# Altium PCB PCB1.PcbDoc
Units mil, origin at the board's own origin, x right, y up, seen from the top; angles counter-clockwise.
Board outline 4235.03 x 3390.01 mil, 2 copper layers (Top Layer, Bottom Layer); 33 components, 44 nets, 165 pads, 6 vias.
Unrouted connection lines stored in the file: 69.
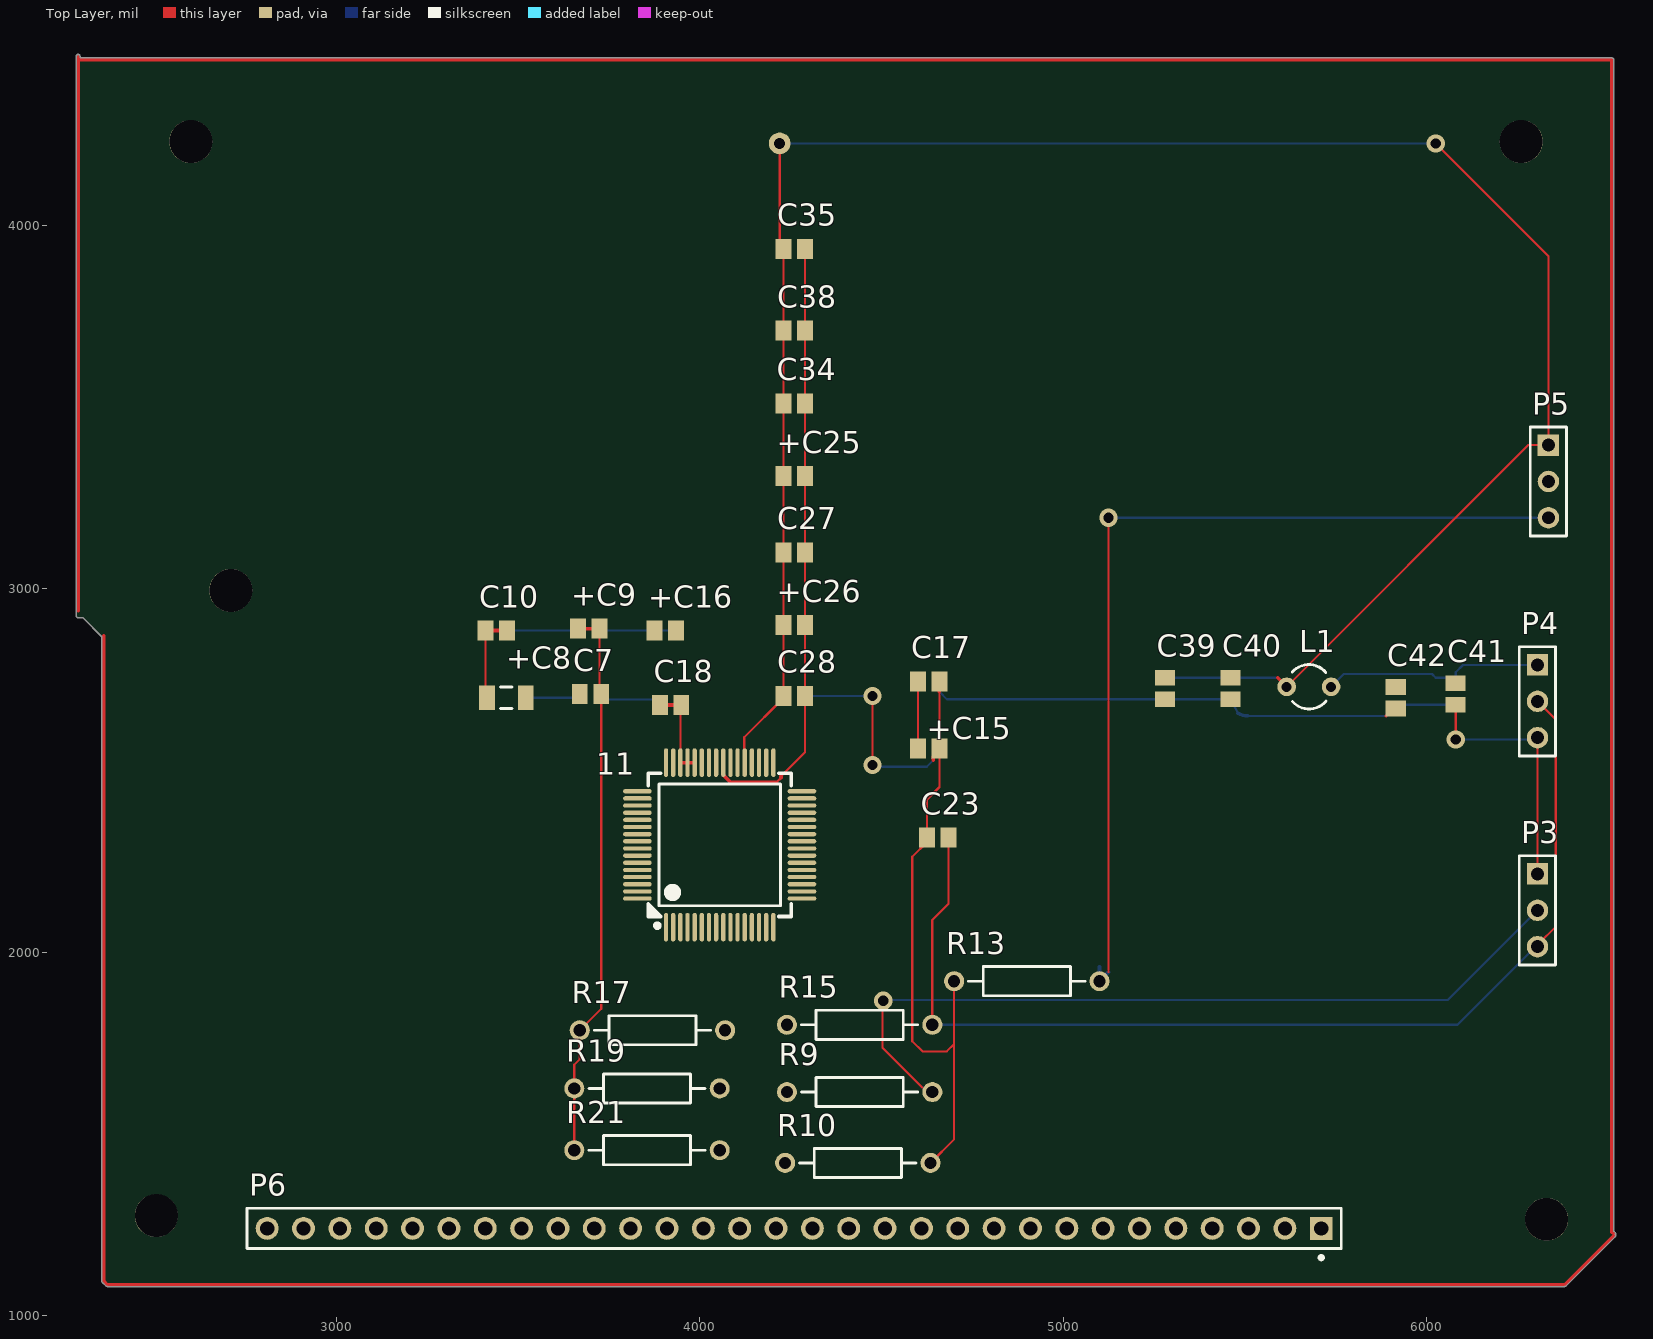
[diagram p0: Top Layer view]
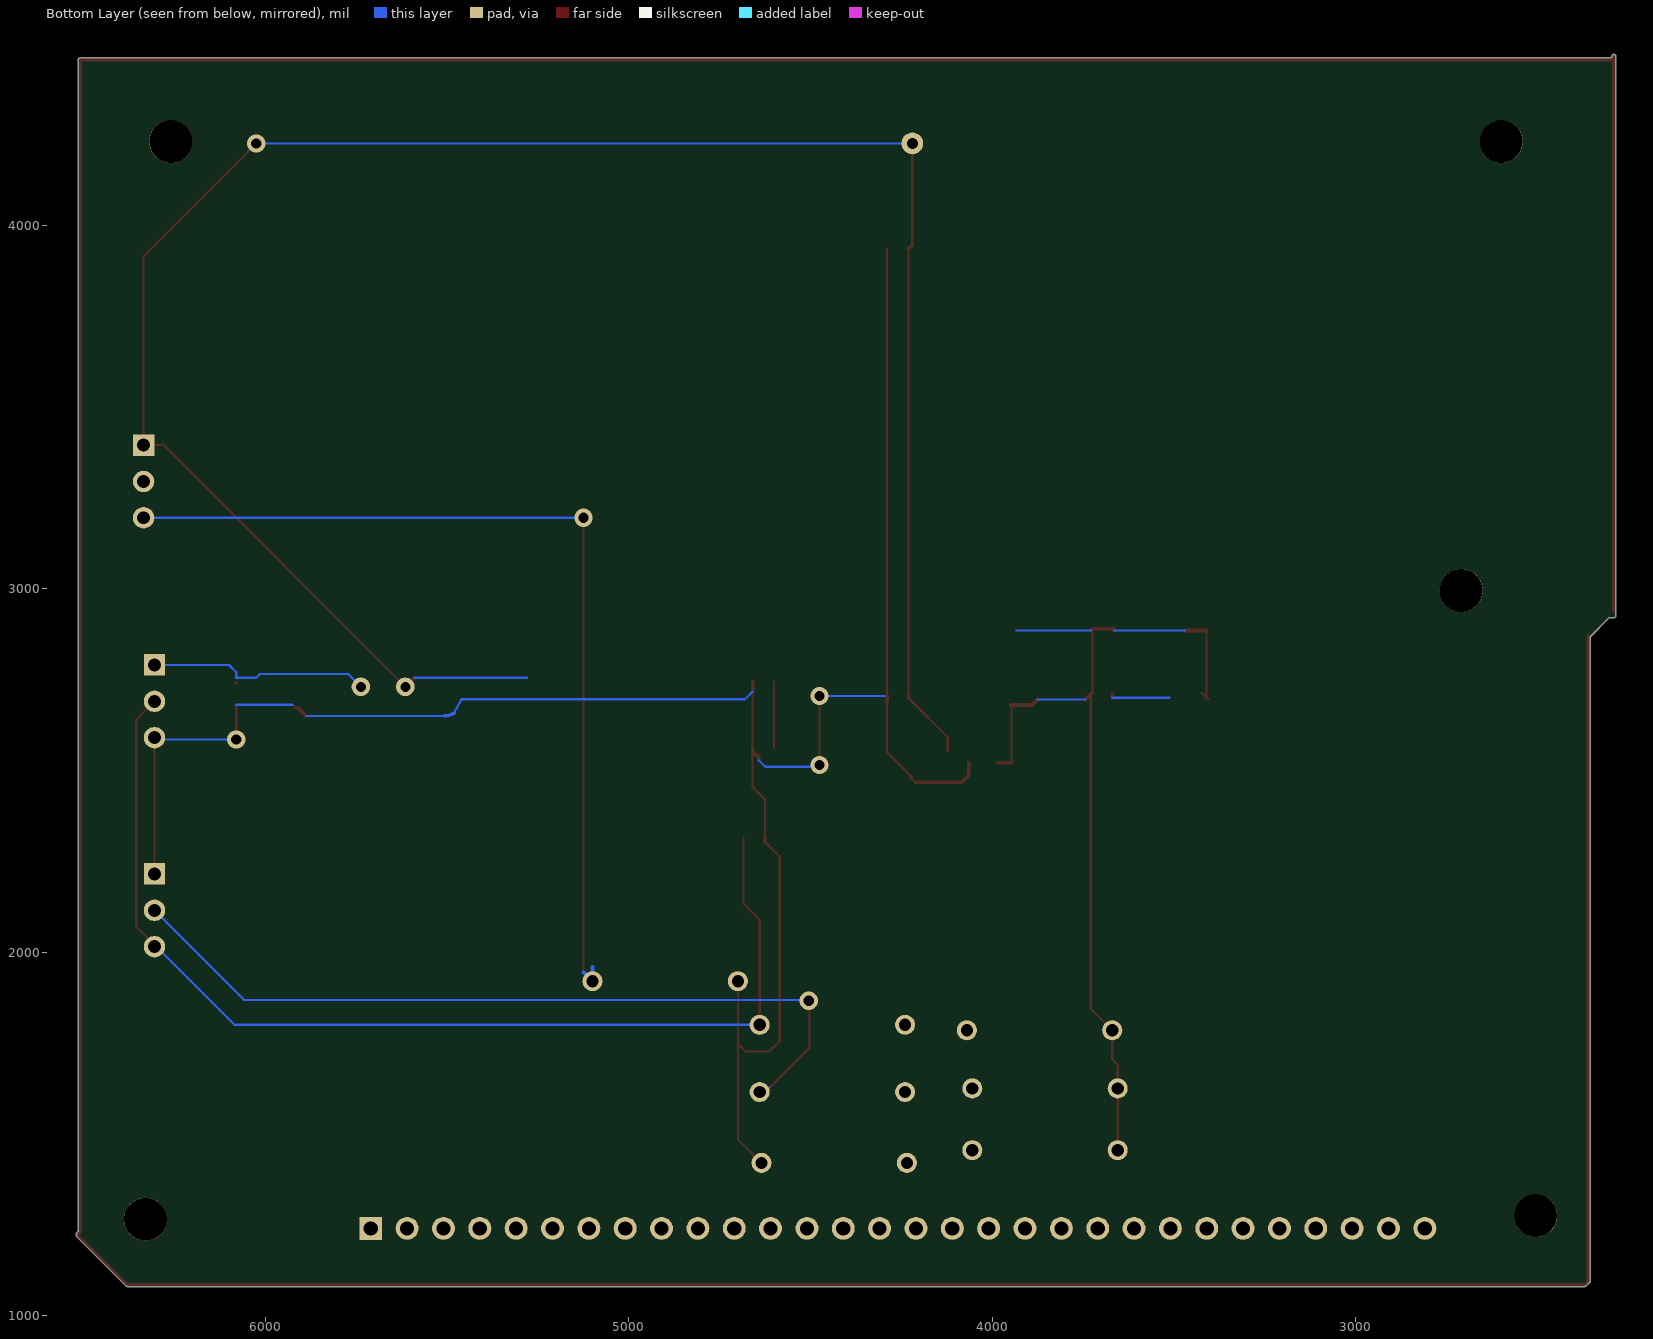
[diagram p1: Bottom Layer view, seen from below]

## Layer stack, top to bottom
Top Solder: solder mask 0.4, Solder Resist, Dk 3.5
Top Layer: signal copper 1.4
Dielectric 1: dielectric 12.6, FR-4, Dk 4.8
Bottom Layer: signal copper 1.4
Bottom Solder: solder mask 0.4, Solder Resist, Dk 3.5

## Board outline
2354.99,2867.92 2302.92,2919.99 2290,2919.99 cw(c2290,2925) 2284.99,2925 2284.99,4465 cw(c2290,4465) 2295.01,4465 2295.01,4460.02 6510,4460.02 cw(c6510,4455) 6515.02,4455 6515.02,1232.08 6518.55,1228.55 cw(c6515,1225) 6520.02,1225 cw(c6515,1225) 6519.35,1222.5 cw(c6515,1220) 6520.02,1220 cw(c6515,1220) 6518.55,1216.45 6383.55,1081.45 6383.56,1081.47 cw(c6380,1085) 6380,1079.98 2370,1079.98 cw(c2370,1085) 2366.44,1081.47 2366.45,1081.45 2356.45,1091.45 2356.47,1091.44 cw(c2360,1095) 2354.99,1095

## Design rules (kind name [scope] priority, off if disabled: settings)
Clearance [All] p1: gap=10 ignorepadtopadclearanceinfootprint=TRUE except(0: Arc-Hole Track-Hole SMDPad-Hole THPad-Hole Via-Hole Fill-Hole Poly-Hole Region-Hole Text-Hole)
PolygonConnect [All] p1: connectstyle=Relief reliefconductorwidth=10 reliefentries=4 polygonreliefangle="90 Angle" airgapwidth=10
RoutingVias [All] p1: holewidth=28 width=50 viastyle="Through Hole" minholewidth=28 minwidth=50 maxholewidth=28 maxwidth=50
SolderMaskExpansion [All] p1: expansion=4 istentingtop=FALSE
Width Width_1 [InNetClass('POWER')] p1: maxlimit=20 minlimit=6 preferedwidth=10
Width [All] p2: maxlimit=20 minlimit=10 preferedwidth=10
30 further rules are at their usual default settings.

## Components (designator, comment, footprint, x,y, rotation, side; value= is the part's Value field where it differs from the comment)
11 "Component_1" LQFP-64_L10.0-W10.0-P0.50-LS12.0-BL 4055,2295 r0 top
+C8 "CD10u/25V-B(3528)" C1206 3468.15,2700 r180 top value=10u/25V
+C9 "CD10u/25V-B(3528)" C0805#1 3694.53,2890 r0 top value=10u/25V
+C15 "CD10u/25V-B(3528)" C0805#1 4630,2560 r0 top value=10u/25V
+C16 "CD10u/25V-B(3528)" C0805#1 3905,2885 r180 top value=10u/25V
+C25 "CD10u/25V-B(3528)" C0805#1 4260,3310 r0 top value=10u/25V
+C26 "CD10u/25V-B(3528)" C0805#1 4260,2900 r0 top value=10u/25V
C7 "C100n-1206" C0805#1 3699.53,2710 r180 top value=100n
C10 "C100n-1206" C0805#1 3440,2885 r180 top value=100n
C17 "C100n-1206" C0805#1 4630,2745 r180 top value=100n
C18 "C100n-1206" C0805#1 3920,2680 r0 top
C23 "C100n-1206" C0805#1 4655,2315 r0 top
C27 "C100n-1206" C0805#1 4260,3100 r180 top
C28 "C100n-1206" C0805#1 4260,2705 r180 top
C34 "C100n-1206" C0805#1 4260,3510 r180 top
C35 "C100n-1206" C0805#1 4260,3935 r180 top
C38 "CD10u/25V-B(3528)" C0805#1 4260,3710 r0 top value=10u/25V
C39 "CD10u/25V-B(3528)" C0805#1 5280,2725.47 r270 top value=10u/25V
C40 "CD10u/25V-B(3528)" C0805#1 5460,2725.47 r270 top value=10u/25V
C41 "CD10u/25V-B(3528)" C0805#1 6080,2710 r270 top value=10u/25V
C42 "C100n-1206" C0805#2 5915,2700 r90 top
L1 "L180R-0603" R38 5676.02,2730 r90 top value=180R
P3 "Header 3" HDR1X3 6305,2215 r270 top
P4 "Header 3" HDR1X3 6305,2790 r270 top
P5 "Header 3" HDR1X3 6335,3395 r270 top
P6 "Header 30" HDR1X30 5710,1240 r180 top
R9 "R300R-0805" AXIAL-0.4 4440,1615 r0 top value=0805/4K3/5%
R10 "R300R-0805" AXIAL-0.4 4435,1420 r180 top value=0805/4K3/5%
R13 "R300R-0805" AXIAL-0.4 4900,1920 r180 top value=0805/4K3/5%
R15 "R300R-0805" AXIAL-0.4 4440,1800 r180 top value=0805/4K3/5%
R17 "R36K-0805" AXIAL-0.4 3870,1785 r180 top value=36K
R19 "R36K-0805" AXIAL-0.4 3855,1625 r180 top value=36K
R21 "R36K-0805" AXIAL-0.4 3855,1455 r180 top value=36K

## Footprints (in the part's own frame and the unit in brackets; to place one, negate y for a bottom-side part, rotate by r counter-clockwise, add the part's x,y. Pads: shape width x height; smd on the part's side, far side on the other; paste and mask are expansions set on the pad)
AXIAL-0.4 [mm] "Axial Device, Thru-Hole; 2 Leads; 0.4 in Pin Spacing"
  round 1.4 hole 0.85: 1(-5.08,0) 2(5.08,0)
  silkscreen extent -4.06,-1.02 4.06,1.02
C0805#1 [mm] "Chip Capacitor, Body 2.0x1.3mm, IPC High Density"
  rect 1.1x1.4 smd: 1(-0.75,0) 2(0.75,0)
  body extent -1.1,-0.72 1.1,0.72, height 1.4
C0805#2 [mm] "Chip Capacitor, Body 2.0x1.3mm, IPC High Density"
  rect 1.1x1.4 smd: 1(-0.75,0) " "(0.75,0)
  body extent -1.1,-0.72 1.1,0.72, height 1.4
C1206 [mm] "Chip Capacitor, Body 3.2x1.6mm, IPC High Density"
  rect 1.1x1.7 smd: 1(-1.35,0) 2(1.35,0)
  silkscreen extent -0.4,-0.75 0.4,0.75, body extent -1.7,-0.9 1.7,0.9, height 1.3
HDR1X3 [mm] "Connector; Header; 3 Position"
  rect 1.5x1.5 hole 0.9: 1(0,0)
  round 1.5 hole 0.9: 2(2.54,0) 3(5.08,0)
  silkscreen extent -1.27,-1.27 6.35,1.27
HDR1X30 [mm] "Connector; Header; 30 Position"
  rect 1.6x1.6 hole 0.99: 1(0,0)
  round 1.6 hole 0.99: 2(2.54,0) 3(5.08,0) 4(7.62,0) 5(10.16,0) 6(12.7,0) 7(15.24,0) 8(17.78,0) 9(20.32,0) 10(22.86,0) 11(25.4,0) 12(27.94,0) 13(30.48,0) 14(33.02,0) 15(35.56,0) 16(38.1,0) 17(40.64,0) 18(43.18,0) 19(45.72,0) 20(48.26,0) 21(50.8,0) 22(53.34,0) 23(55.88,0) 24(58.42,0) 25(60.96,0) 26(63.5,0) 27(66.04,0) 28(68.58,0) 29(71.12,0) 30(73.66,0)
  silkscreen extent -1.4,-1.4 75.06,2.17
LQFP-64_L10.0-W10.0-P0.50-LS12.0-BL [mm]
  oval 0.3x2 smd: 1(-3.75,-5.75) 2(-3.25,-5.75) 3(-2.75,-5.75) 4(-2.25,-5.75) 5(-1.75,-5.75) 6(-1.25,-5.75) 7(-0.75,-5.75) 8(-0.25,-5.75) 9(0.25,-5.75) 10(0.75,-5.75) 11(1.25,-5.75) 12(1.75,-5.75) 13(2.25,-5.75) 14(2.75,-5.75) 15(3.25,-5.75) 16(3.75,-5.75) 33(3.75,5.75) 34(3.25,5.75) 35(2.75,5.75) 36(2.25,5.75) 37(1.75,5.75) 38(1.25,5.75) 39(0.75,5.75) 40(0.25,5.75) 41(-0.25,5.75) 42(-0.75,5.75) 43(-1.25,5.75) 44(-1.75,5.75) 45(-2.25,5.75) 46(-2.75,5.75) 47(-3.25,5.75) 48(-3.75,5.75)
  oval 2x0.3 smd: 17(5.75,-3.75) 18(5.75,-3.25) 19(5.75,-2.75) 20(5.75,-2.25) 21(5.75,-1.75) 22(5.75,-1.25) 23(5.75,-0.75) 24(5.75,-0.25) 25(5.75,0.25) 26(5.75,0.75) 27(5.75,1.25) 28(5.75,1.75) 29(5.75,2.25) 30(5.75,2.75) 31(5.75,3.25) 32(5.75,3.75) 49(-5.75,3.75) 50(-5.75,3.25) 51(-5.75,2.75) 52(-5.75,2.25) 53(-5.75,1.75) 54(-5.75,1.25) 55(-5.75,0.75) 56(-5.75,0.25) 57(-5.75,-0.25) 58(-5.75,-0.75) 59(-5.75,-1.25) 60(-5.75,-1.75) 61(-5.75,-2.25) 62(-5.75,-2.75) 63(-5.75,-3.25) 64(-5.75,-3.75)
  silkscreen extent -5,-5.79 5,5
R38 [mm] "Crystal, Thru-Hole; 2 Leads; Body 3.1 x 8.2 mm (Dia.xH)"
  round 1.3 hole 0.7: 1(0,1.55) 2(0,-1.55)
  silkscreen extent -1.55,-1.19 1.55,1.17

## Part data
+C8 +C9 +C15 +C16 +C25 +C26 C38 C39 C40 C41: "Pb-free,贴片钽电容,10uF,±10%,25V,SMD,B型(3528),-25～+85℃,带装", Part Number=3DZ0040212, specification=Pb-free,贴片钽电容,10uF,±10%,25V,SMD,B型(3528),-25～+85℃,带装
C7 C10 C17 C18 C23 C27 C28 C34 C35 C42: "Pb-free,1206L,100nF,NPO,±10%,50V,-55℃～125℃,N（三层电镀端头）,带装", Part Number=3DZ0040032, specification=Pb-free,1206L,100nF,NPO,±10%,50V,-55℃～125℃,N（三层电镀端头）,带装
L1: "Pb-free,片式磁珠,180Ω（@100MHz）,Rdc=0.45,IR=200mA,0603,±25%,", Part Number=3DZ0052001, specification=Pb-free,片式磁珠,180Ω（@100MHz）,Rdc=0.45,IR=200mA,0603,±25%,
P3 P4 P5: "Header, 3-Pin", LatestRevisionDate=17-Jul-2002, LatestRevisionNote="Re-released for DXP Platform.", Publisher="Altium Limited"
P6: "Header, 30-Pin", LatestRevisionDate=17-Jul-2002, LatestRevisionNote="Re-released for DXP Platform.", Publisher="Altium Limited"
R9 R10 R13 R15: "Pb-free,0805,300Ω,1%,1/8W,±100PPM,100V,-55℃～155℃", Part Number=3DZ0030046, specification=Pb-free,0805,300Ω,1%,1/8W,±100PPM,100V,-55℃～155℃
R17 R19 R21: "Pb-free,0805,36kΩ,1%,1/8W,±100PPM,100V,-55℃～155℃", Part Number=3DZ0030050, specification=Pb-free,0805,36kΩ,1%,1/8W,±100PPM,100V,-55℃～155℃

## Free pads (board coordinates)
  round 118.11 hole 118.11: 2(2505,1275) 2(2600,4230) 2(2710,2995) 2(6260,4230) 2(6330,1265)
  round 60 hole 30: 4(4220,4225)

## Via types
v1: diameter 50, hole 28, Top Layer to Bottom Layer, 6 vias

## Nets (pads, with @x,y where several pads share a name; then routed paths per layer and width w, separated by ;. In a path a pad name is that pad's centre, name@x,y a point inside that pad or via, vN(x,y) a via of type N, cw(c..) or ccw(c..) an arc to the next point about the centre after c; other vN are vias at no path point)
0V: 11.50 11.52 11.54 11.56 11.58 11.60 11.62 11.64
3.3V: 11.23 C23.2 P3.3 P4.2 R15.1 | length 3001
  Top Layer w6: R15.1 4640,2088.47 4684.53,2133 C23.2 ; P4.2 6355,2640 6355,2070 P3.3@6310,2025
  Bottom Layer w6: R15.1 6085,1800 P3.3@6310,2025
5V: C41.1 L1.2 P4.1 | length 505.4
  Top Layer w10: C41.1 C41.1@6080.32,2739.85
  Bottom Layer w6: L1.2 5772.05,2765 5979.35,2765 ; 6080.32,2755 6080.32,2770.32 6100,2790 P4.1
"AD2 BUSY": 11.14
"AD2 OS0": 11.3 R21.1
"AD2 OS1": 11.4 R19.1
"AD2 OS2": 11.5 R17.1
"AD2 RANGE": 11.8 R9.1
"AD2 REFCAP": 11.2 11.26 11.35 11.39 11.40 11.41 11.43 11.44 11.45 11.46 11.47 +C8.2 +C9.1 +C9.2 +C15.2 +C16.1 +C16.2 +C25.2 +C26.2 C7.1 C10.1 C10.2 C17.1 C18.1 C18.2 C23.1 C27.1 C28.1 C34.1 C35.1 C38.2 C39.2 C40.2 C41.2 C42.1 P3.1 P4.3 R10.1 R13.2 R17.2 R19.2 R21.2 | length 8381.2
  Top Layer w6: +C8.2@3405,2695 +C8.2@3412.5,2702.5 ; C10.2 3410.47,2704.53 +C8.2@3412.5,2702.5 ; +C8.2 +C8.2@3412.5,2702.5 ; +C8.2@3423.15,2713.15 +C8.2@3412.5,2702.5 ; R21.2 R19.2 3655,1690 3670,1705 R17.2 3729.06,1844.06 C7.1 ; C7.1@3724.06,2715 +C9.2@3724.06,2885 ; 11.46 C18.2@3946.73,2677.2 ; 4211.3,2467 4223.55,2479.25 ; 4225,2485 4223.55,2483.55 4289.53,2549.53 C28.1@4289.53,2690.47 ; C28.1 +C26.2 C27.1 +C25.2 C34.1 C38.2 C35.1 ; C23.1@4625.47,2303 4585,2262.53 4585,1755 4613,1727 4680,1727 4700,1747 ; C23.1 4625.47,2420 4659.53,2454.06 +C15.2@4659.53,2544.53 ; R10.1 4700,1485 4700,1747 ; +C15.2 4659.53,2716.42 ; R13.2 4700,1747 ; C42.1 C42.1@5925,2680.47 ; v1(6080,2584.63) C41.2 ; P3.1 P4.3
  Top Layer w10: C10.2 C10.1 ; +C9.1@3665,2885 +C9.1 +C9.2 +C9.2@3729.06,2885 ; C7.1@3724.06,2715 C7.1 C7.1@3744.06,2695 ; C18.1@3875.47,2695 C18.1 C18.2 C18.2@3946.73,2677.2 ; 11.46 11.45 11.44 ; 11.40 4065.19,2521.02 4065.19,2486.42 4084.6,2467 4211.3,2467 ; 4223.55,2479.25 4223.55,2483.55 ; C28.1@4289.53,2690.47 C28.1 ; C23.1@4625.47,2303 C23.1 ; 4642.87,2527.87 4642.87,2537.44 4649.96,2544.53 4659.53,2544.53 +C15.2 ; 4659.53,2716.42 C17.1 ; C42.1@5888.62,2650 5909.09,2670.47 C42.1
  Bottom Layer w6: 3469.53,2885 3665,2885 ; 3729.06,2885 3934.53,2885 ; 3744.06,2695 3875.47,2695 ; v1@4475,2510 4625,2510 4642.87,2527.87 ; 4659.53,2716.42 4680,2695.94 5280,2695.94 5460,2695.94 5480.71,2657.65 ; 5507.54,2650 5888.62,2650 ; 5925,2680.47 6080,2680.47 ; v1(6080,2584.63) 6299.63,2584.63 P4.3
  Bottom Layer w10: 5480.71,2657.65 ccw(c5507.55,2700.9) 5507.54,2650
  other v1: 4475,2515
"AD2 REFSEL": 11.34 P5.3 R13.1 | length 40
  Bottom Layer w10: R13.1 5100,1960
"AD2 SERPAR SEL": 11.6 R10.2
"AD2 STBY": 11.7 R15.2
"AD VACC": 11.1 11.37 11.38 11.48 +C25.1 +C26.1 C27.2 C28.2 C34.2 C35.2 C38.1 C39.1 C40.1 L1.1 P5.1 pad.4 | length 5823.2
  Top Layer w6: 11.37@4122.67,2555 4122.67,2591.3 C28.2@4230.47,2699.09 ; C35.2@4220,3945.47 pad.4 ; C28.2 +C26.1 C27.2 +C25.1 C34.2 C38.1 C35.2 ; L1.1 6280,3395 P5.1 6335,3915 v1(6025,4225)
  Top Layer w10: C35.2@4220,3945.47 C35.2 ; C28.2@4230.47,2699.09 C28.2 ; 5590,2755 L1.1
  Bottom Layer w6: pad.4 v1(6025,4225) ; 5280,2755 5460,2755 5590,2755
ADINB0: 11.49
ADINB1: 11.51
ADINB2: 11.53
ADINB3: 11.55
ADINB4: 11.57
ADINB5: 11.59
ADINB6: 11.61
ADINB7: 11.63
"ADR421 VOUT": 11.42 +C8.1 C7.2 | length 166.8
  Top Layer w10: C7.2@3670,2700 C7.2
  Bottom Layer w6: 3513.15,2700 3670,2700
ADRES: 11.11 P5.2
D0: 11.16 P6.15
D1: 11.17 P6.16
D2: 11.18 P6.17
D3: 11.19 P6.18
D4: 11.20 P6.19
D5: 11.21 P6.20
D6: 11.22 P6.21
D7: 11.24 P6.22
D8: 11.25 P6.23
D9: 11.27 P6.24
D10: 11.28 P6.25
D11: 11.29 P6.26
D12: 11.30 P6.27
D13: 11.31 P6.28
D14: 11.32 P6.29
D15: 11.33 P6.30
Net11_9: 11.9 11.10
Net11_36: 11.36 +C15.1 C17.2 | length 185
  Top Layer w6: +C15.1 C17.2
NetP3_2: P3.2 R9.2 | length 2220.7
  Top Layer w6: v1@4503.04,1864.53 4503.04,1736.96 4612.65,1627.35
  Bottom Layer w6: v1@4503.04,1864.53 4506.56,1868.04 6058.04,1868.04 P3.2 ; 4612.65,1627.35 4614.36,1627.35 4626.71,1615 R9.2
  other v1: 4504.8,1866.29
XADS2: 11.13
XRD*: 11.12
pads on no net: 11.15 "C42. " P6.1 P6.2 P6.3 P6.4 P6.5 P6.6 P6.7 P6.8 P6.9 P6.10 P6.11 P6.12 P6.13 P6.14
copper on no net: | length 17932.3
  Top Layer w6: 4475,2515 v1(4475,2705) ; 5125,1945 v1(5125,3195)
  Top Layer w10: 2290,2940 2290,4465 ; 2295,4455 6510,4455 6510,1275 6510,1230 6515,1225 ; 2360,2870 2360,1095 2370,1085 6380,1085 6515,1220
  Bottom Layer w6: 4295,2705 v1(4475,2705) ; v1(5125,3195) 6335,3195 ; 5979.35,2765 6015,2765 6025,2755 6080,2755
  Bottom Layer w10: 5100,1920 5125,1945